# Altium PCB PCB1.PcbDoc
Units mil, origin at the board's own origin, x right, y up, seen from the top; angles counter-clockwise.
Board outline 5512.72 x 4848.62 mil, 2 copper layers (Top Layer, Bottom Layer); 49 components, 36 nets, 186 pads, 0 vias.
Unrouted connection lines stored in the file: 29.
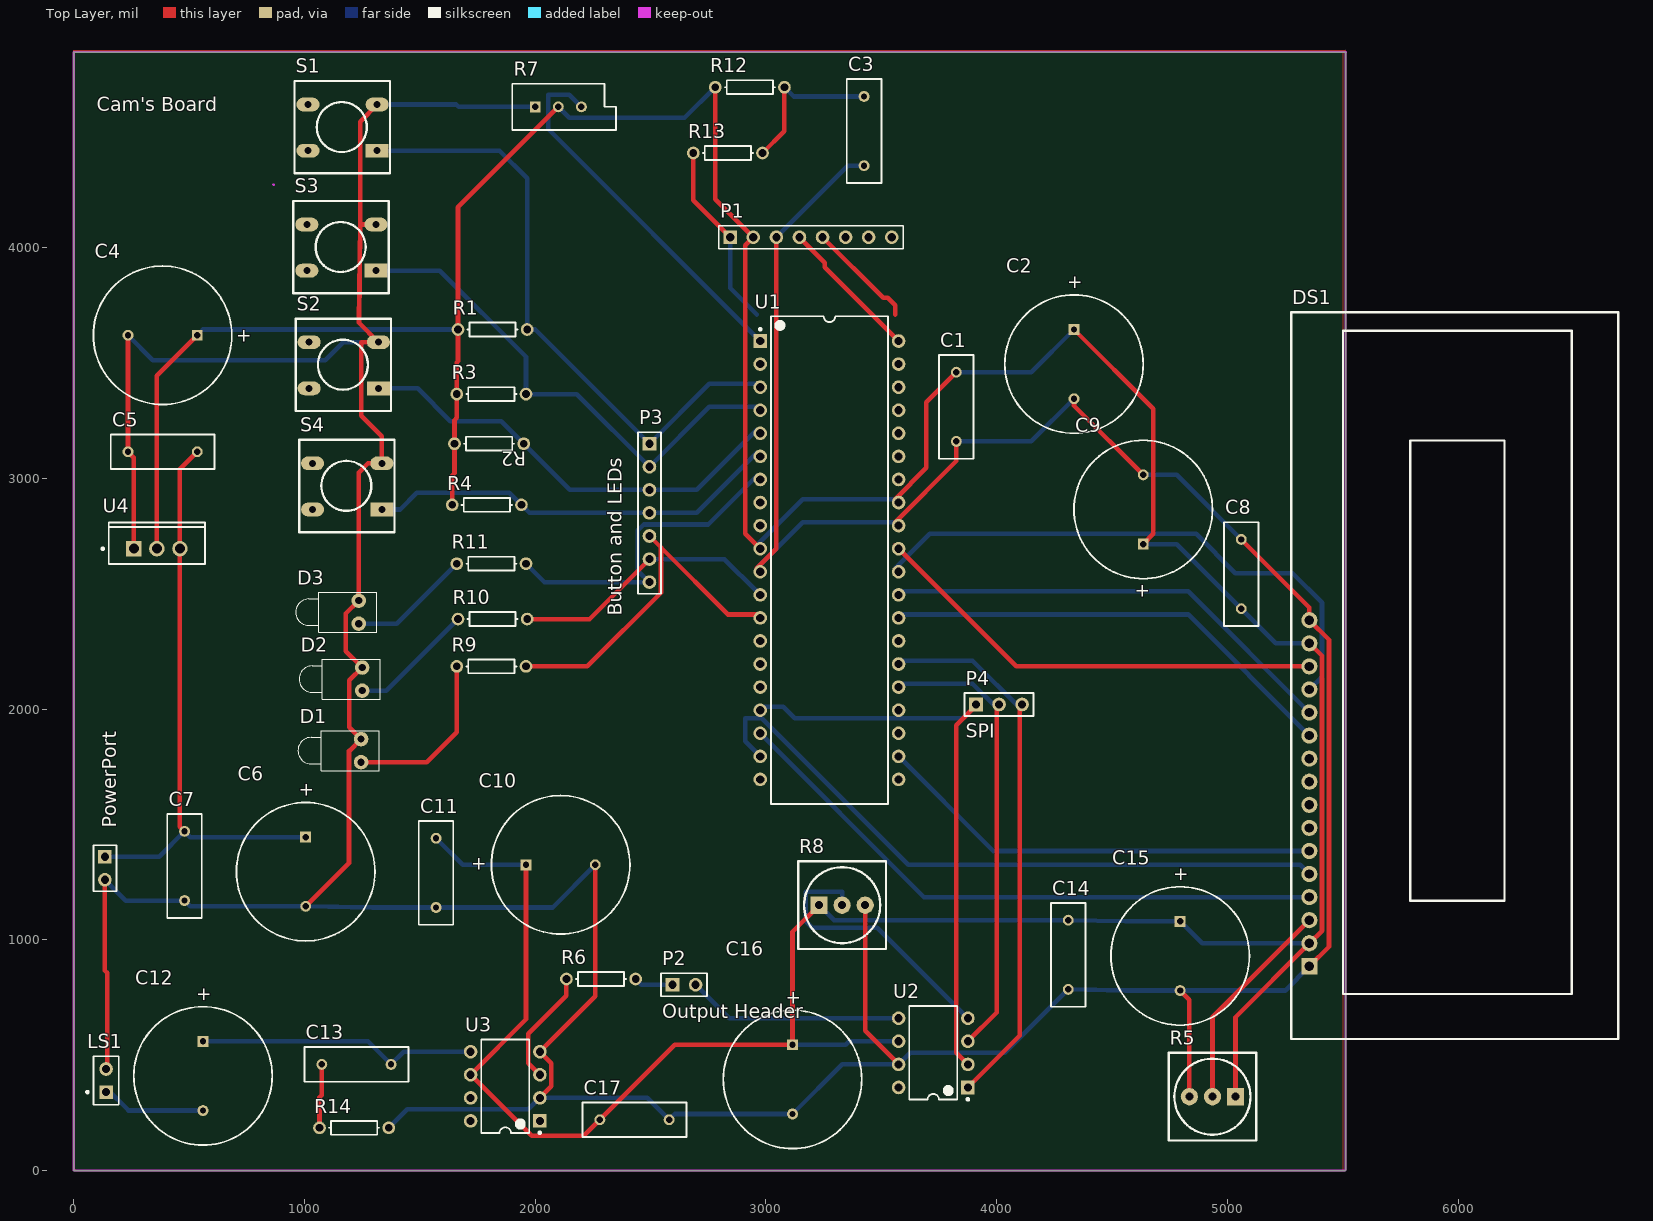
[diagram p0: Top Layer view]
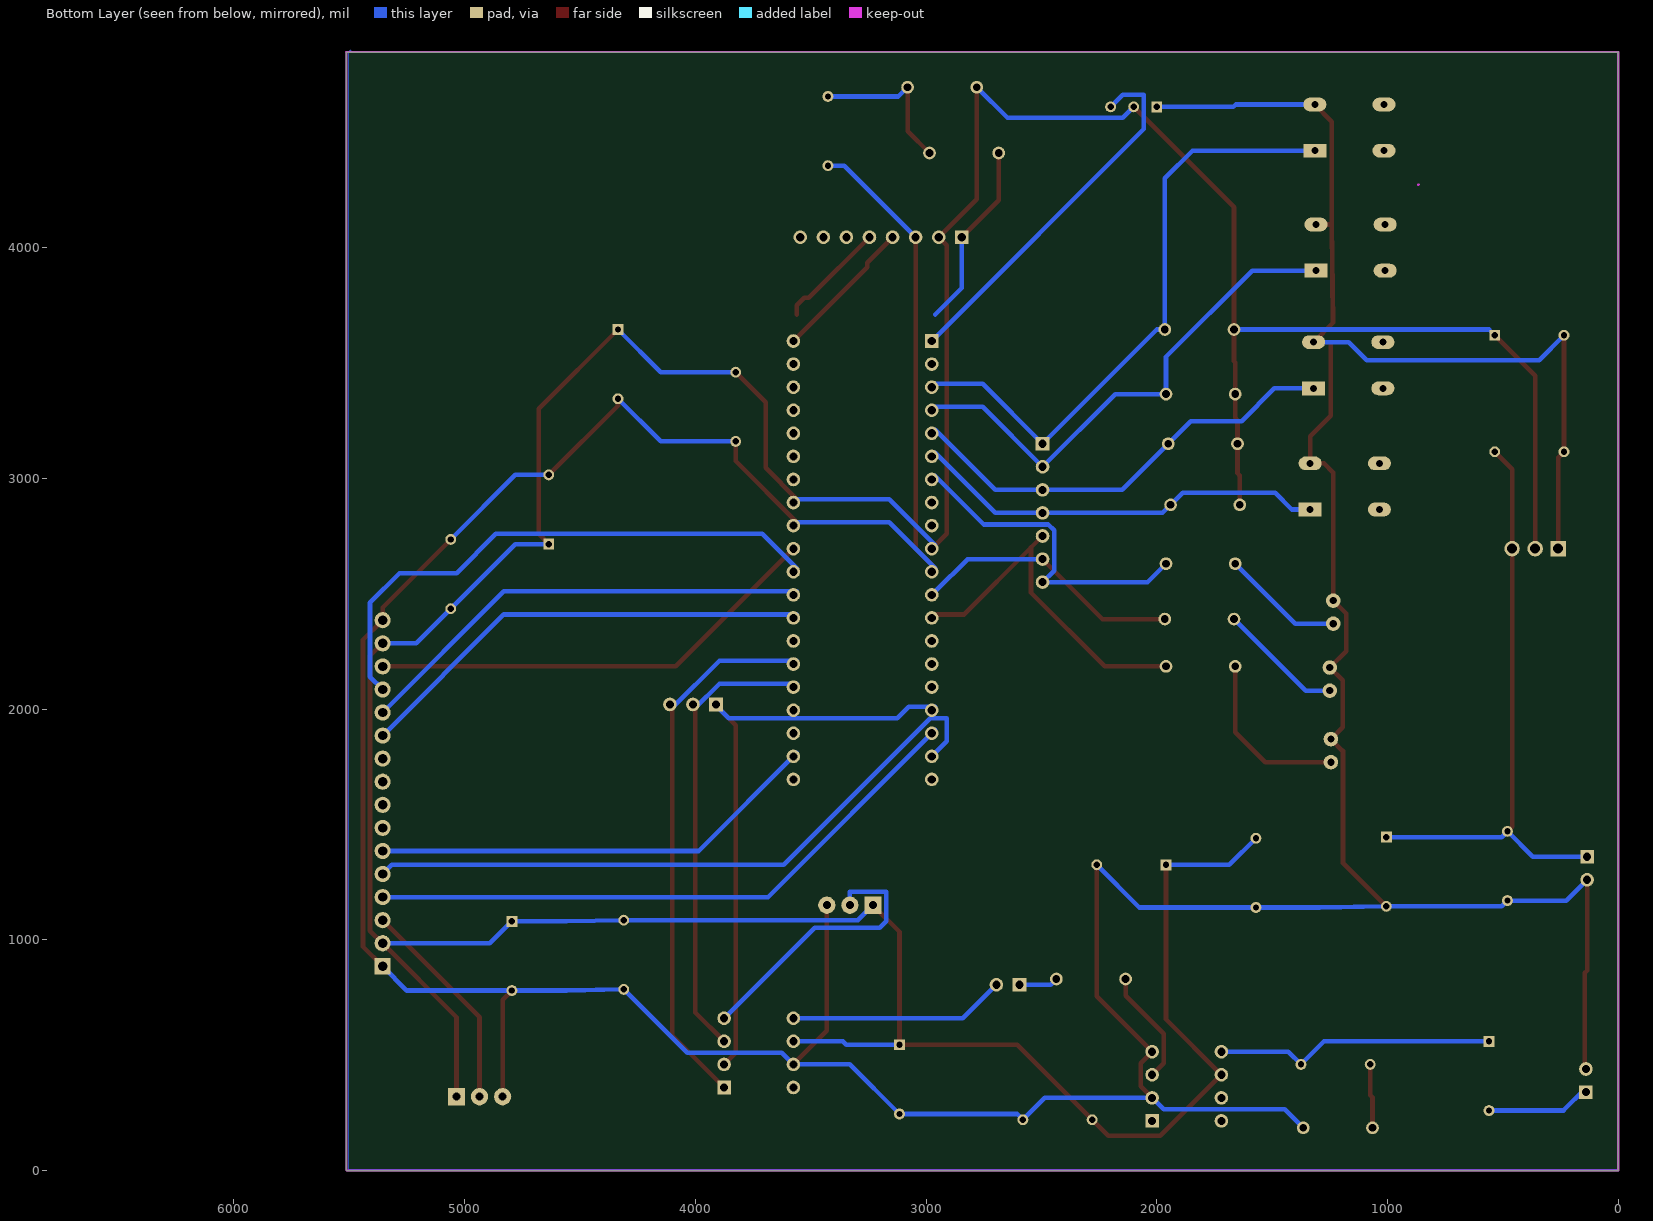
[diagram p1: Bottom Layer view, seen from below]

## Layer stack, top to bottom
Top Solder: solder mask 0.4, Solder Resist, Dk 3.5
Top Layer: signal copper 1.4
Dielectric 1: dielectric 12.6, FR-4, Dk 4.8
Bottom Layer: signal copper 1.4
Bottom Solder: solder mask 0.4, Solder Resist, Dk 3.5

## Board outline
0,0 5510,0 5511.72,1.72 5511.72,4846.28 5512.72,4847.28 1.34,4847.28 0,4848.62

## Design rules (kind name [scope] priority, off if disabled: settings)
Clearance [InPolygon] p1: gap=50 ignorepadtopadclearanceinfootprint=FALSE
PolygonConnect [All] p1: connectstyle=Relief reliefconductorwidth=10 reliefentries=4 polygonreliefangle="90 Angle" airgapwidth=10
RoutingVias [All] p1: holewidth=28 width=50 viastyle="Through Hole" minholewidth=28 minwidth=50 maxholewidth=28 maxwidth=50
SolderMaskExpansion [All] p1: expansion=4 istentingtop=FALSE
Width [All] p1: maxlimit=20 minlimit=20 preferedwidth=20
30 further rules are at their usual default settings.

## Components (designator, comment, footprint, x,y, rotation, side; value= is the part's Value field where it differs from the comment)
C1 "Cap" RAD-0.3 3825,3310 r90 top value=.1uF
C2 "Cap Pol1" RB7.6-15 4335,3495 r90 top value=100pF
C3 "Cap" RAD-0.3 3425,4505 r90 top value=0.1uF
C4 "Cap Pol1" RB7.6-15 385,3620 r0 top value=100pF
C5 "Cap" RAD-0.3 385,3115 r0 top value=0.47uF
C6 "Cap Pol1" RB7.6-15 1005,1295 r90 top value=100uF
C7 "Cap" RAD-0.3 480,1320 r90 top value=100nF
C8 "Cap" RAD-0.3 5060,2585 r270 top value=100pF
C9 "Cap Pol1" RB7.6-15 4635,2865 r270 top value=100pF
C10 "Cap Pol1" RB7.6-15 2110,1325 r180 top value=100pF
C11 "Cap" RAD-0.3 1570,1290 r90 top value=100pF
C12 "Cap Pol1" RB7.6-15 560,410 r90 top value=20uF
C13 "Cap" RAD-0.3 1225,460 r0 top value=100pF
C14 "Cap" RAD-0.3 4310,935 r270 top value=100pF
C15 "Cap Pol1" RB7.6-15 4795,930 r90 top value=100pF
C16 "Cap Pol1" RB7.6-15 3115,395 r90 top value=100pF
C17 "Cap" RAD-0.3 2430,220 r180 top value=100pF
D1 "LED1" LED-1 1245,1820 r180 top
D2 "LED1" LED-1 1250,2130 r180 top
D3 "LED1" LED-1 1235,2420 r180 top
DS1 "LCD 44780" "OLED 16x2" 5355,885 r90 top
LS1 "Speaker" PIN2 140,340 r90 top
P1 "Header 8" HDR1X8 2845,4045 r0 top
P2 "Output Header" HDR1X2 2595,805 r0 top
P3 "Button and LEDs" HDR1X7 2495,3150 r270 top
P4 "SPI" HDR1X3 3910,2020 r0 top
PowerPort "Header 2" HDR1X2 135,1360 r270 top
R1 "Res1" AXIAL-0.3 1815,3645 r0 top value=1K
R2 "Res1" AXIAL-0.3 1800,3150 r0 top value=1K
R3 "Res1" AXIAL-0.3 1810,3365 r0 top value=1K
R4 "Res1" AXIAL-0.3 1790,2885 r0 top value=1K
R5 "RPot_3" "Rpot Square in line" 4935,320 r270 top value=10K
R6 "Res1" AXIAL-0.3 2285,830 r180 top value=1K
R7 "RPot" VR5 2100,4610 r0 top value=1K
R8 "RPot_3" "Rpot Square in line" 3330,1150 r90 top value=10K
R9 "Res1" AXIAL-0.3 1810,2185 r180 top value=150
R10 "Res1" AXIAL-0.3 1815,2390 r180 top value=150
R11 "Res1" AXIAL-0.3 1810,2630 r180 top value=53
R12 "Res1" AXIAL-0.3 2930,4695 r180 top value=10k
R13 "Res1" AXIAL-0.3 2835,4410 r180 top value=470
R14 "Res1" AXIAL-0.3 1215,185 r180 top value=1K
S1 "SF SMD SW" "SW PB" 1315,4420 r180 top
S2 "SF SMD SW" "SW PB" 1320,3390 r180 top
S3 "SF SMD SW" "SW PB" 1310,3900 r180 top
S4 "SF SMD SW" "SW PB" 1335,2865 r180 top
U1 "PIC18F4620-I/P" PDIP600-P40 3275,2645 r0 top
U2 "LT1661" DIP-8 3725,510 r180 top
U3 "LM386N-1" DIP-8 1870,365 r180 top
U4 "LT1086CT-5" LT-T-3 360,2695 r90 top

## Footprints (in the part's own frame and the unit in brackets; to place one, negate y for a bottom-side part, rotate by r counter-clockwise, add the part's x,y. Pads: shape width x height; smd on the part's side, far side on the other; paste and mask are expansions set on the pad)
AXIAL-0.3 [mm] "Axial Device, Thru-Hole; 2 Leads; 0.3 in Pin Spacing"
  round 1.4 hole 0.85: 1(-3.81,0) 2(3.81,0)
  silkscreen extent -2.77,-0.76 2.77,0.76
DIP-8 [mm]
  rect 1.5x1.5 hole 0.9: 1(-3.81,3.81)
  round 1.5 hole 0.9: 2(-3.81,1.27) 3(-3.81,-1.27) 4(-3.81,-3.81) 5(3.81,-3.81) 6(3.81,-1.27) 7(3.81,1.27) 8(3.81,3.81)
  silkscreen extent -3.94,-5.15 2.65,5.23, body extent -3.6,-5.15 3.6,5.15, height 5.08
HDR1X2 [mm] "Connector; Header; 2 Position"
  rect 1.5x1.5 hole 0.9: 1(0,0)
  round 1.5 hole 0.9: 2(2.54,0)
  silkscreen extent -1.27,-1.27 3.81,1.27
HDR1X3 [mm] "Connector; Header; 3 Position"
  rect 1.5x1.5 hole 0.9: 1(0,0)
  round 1.5 hole 0.9: 2(2.54,0) 3(5.08,0)
  silkscreen extent -1.27,-1.27 6.35,1.27
HDR1X7 [mm] "Connector; Header; 7 Position"
  rect 1.5x1.5 hole 0.9: 1(0,0)
  round 1.5 hole 0.9: 2(2.54,0) 3(5.08,0) 4(7.62,0) 5(10.16,0) 6(12.7,0) 7(15.24,0)
  silkscreen extent -1.27,-1.27 16.51,1.27
HDR1X8 [mm] "Connector; Header; 8 Position"
  rect 1.5x1.5 hole 0.9: 1(0,0)
  round 1.5 hole 0.9: 2(2.54,0) 3(5.08,0) 4(7.62,0) 5(10.16,0) 6(12.7,0) 7(15.24,0) 8(17.78,0)
  silkscreen extent -1.27,-1.27 19.05,1.27
LED-1 [mm] "LED; 2 Leads"
  round 1.6 hole 0.8: 1(0,1.27) 2(0,-1.27)
  silkscreen extent -2,-2.2 6.95,2.2
LT-T-3 [mm]
  rect 1.7x1.7 hole 1.1: 1(0,2.54)
  round 1.7 hole 1.1: 2(0,0) 3(0,-2.54)
  silkscreen extent -1.7,-5.3 2.9,6.07, body extent -1.7,-5.28 2.9,5.28, height 22.15
"OLED 16x2" [mil]
  rect 70x70 hole 40: 1(0,0)
  round 70 hole 40: 2(100,0) 3(200,0) 4(300,0) 5(400,0) 6(500,0) 7(600,0) 8(700,0) 9(800,0) 10(900,0) 11(1000,0) 12(1100,0) 13(1200,0) 14(1300,0) 15(1400,0) 16(1500,0)
  silkscreen extent -315,-1339 2835,79
PDIP600-P40 [mm]
  rect 1.5x1.5 hole 0.9: 1(-7.62,24.13)
  round 1.5 hole 0.9: 2(-7.62,21.59) 3(-7.62,19.05) 4(-7.62,16.51) 5(-7.62,13.97) 6(-7.62,11.43) 7(-7.62,8.89) 8(-7.62,6.35) 9(-7.62,3.81) 10(-7.62,1.27) 11(-7.62,-1.27) 12(-7.62,-3.81) 13(-7.62,-6.35) 14(-7.62,-8.89) 15(-7.62,-11.43) 16(-7.62,-13.97) 17(-7.62,-16.51) 18(-7.62,-19.05) 19(-7.62,-21.59) 20(-7.62,-24.13) 21(7.62,-24.13) 22(7.62,-21.59) 23(7.62,-19.05) 24(7.62,-16.51) 25(7.62,-13.97) 26(7.62,-11.43) 27(7.62,-8.89) 28(7.62,-6.35) 29(7.62,-3.81) 30(7.62,-1.27) 31(7.62,1.27) 32(7.62,3.81) 33(7.62,6.35) 34(7.62,8.89) 35(7.62,11.43) 36(7.62,13.97) 37(7.62,16.51) 38(7.62,19.05) 39(7.62,21.59) 40(7.62,24.13)
  silkscreen extent -7.74,-26.85 6.45,26.85, body extent -7.3,-26.85 7.3,26.85, height 6.35
PIN2 [mm] "Photosensitive Diode; 2 Leads"
  rect 1.5x1.5 hole 0.9: 1(0,0)
  round 1.5 hole 0.9: 2(2.54,0)
  silkscreen extent -1.4,-1.4 3.94,2.17
RAD-0.3 [mm] "Radial Cap, Thru-Hole; 2 Leads; 0.3 in Pin Spacing"
  round 1.2 hole 0.7: 1(-3.81,0) 2(3.81,0)
  silkscreen extent -5.71,-1.91 5.71,1.91
RB7.6-15 [mm] "Polarized Capacitor (Radial); 2 Leads"
  rect 1.2x1.2 hole 0.7: 1(3.81,0)
  round 1.2 hole 0.7: 2(-3.81,0)
  silkscreen extent -7.62,-7.62 7.62,7.62
"Rpot Square in line" [mil]
  rect 75x75 hole 35: 1(0,100)
  round 75 hole 35: 2(0,0) 3(0,-100)
  silkscreen extent -190,-190 190,190
"SW PB" [mil]
  rect 100x60 hole 30: 1(0,0)
  oval 100x60 hole 30: 2(0,-200) 3(300,-200) 4(300,0)
  silkscreen extent -55,-302 358,98
VR5 [mm] "Thru-Hole; 3 Leads"
  rect 1.2x1.2 hole 0.7: 1(-2.54,0)
  round 1.2 hole 0.7: 2(0,0) 3(2.54,0)
  silkscreen extent -5.08,-2.54 6.35,2.54

## Part data
C1 C3 C5 C7 C8 C11 C13 C14 C17: "Capacitor", LatestRevisionDate=17-Jul-2002, LatestRevisionNote="Re-released for DXP Platform.", PackageDescription="Radial Cap, Thru-Hole; 2 Leads; 0.3 in Pin Spacing", PackageReference=RAD-0.3, Published=8-Jun-2000, Publisher="Altium Limited"
C2 C4 C6 C9 C10 C12 C15 C16: "Polarized Capacitor (Radial)", LatestRevisionDate=17-Jul-2002, LatestRevisionNote="Re-released for DXP Platform.", PackageDescription="Polarized Capacitor (Radial); 2 Leads", PackageReference=RB7.6-15, Published=8-Jun-2000, Publisher="Altium Limited"
D1 D2 D3: "Typical RED GaAs LED", LatestRevisionDate=08-Jul-2005, LatestRevisionNote="Mech Layer 1 removed.", PackageDescription="LED; 2 Leads", PackageReference=LED-1, Published=8-Jun-2000, Publisher="Altium Limited"
LS1: "Loudspeaker", LatestRevisionDate=17-Jul-2002, LatestRevisionNote="Re-released for DXP Platform.", PackageReference=PIN2, Published=24-Mar-1999, Publisher="Altium Limited"
P1: "Header, 8-Pin", LatestRevisionDate=17-Jul-2002, LatestRevisionNote="Re-released for DXP Platform.", Publisher="Altium Limited"
P2: library part "Header 2", "Header, 2-Pin", LatestRevisionDate=17-Jul-2002, LatestRevisionNote="Re-released for DXP Platform.", Publisher="Altium Limited"
P3: library part "Header 7", "Header, 7-Pin", LatestRevisionDate=17-Jul-2002, LatestRevisionNote="Re-released for DXP Platform.", Publisher="Altium Limited"
P4: library part "Header 3", "Header, 3-Pin", LatestRevisionDate=17-Jul-2002, LatestRevisionNote="Re-released for DXP Platform.", Publisher="Altium Limited"
PowerPort: "Header, 2-Pin", LatestRevisionDate=17-Jul-2002, LatestRevisionNote="Re-released for DXP Platform.", Publisher="Altium Limited"
R1 R2 R3 R4 R6 R9 R10 R11 R12 R13 R14: "Resistor", LatestRevisionDate=17-Jul-2002, LatestRevisionNote="Re-released for DXP Platform.", PackageDescription="Axial Device, Thru-Hole; 2 Leads; 0.3 in Pin Spacing", PackageReference=AXIAL-0.3, Published=8-Jun-2000, Publisher="Altium Limited"
R5 R8: library part RPot_7, "Potentiometer", LatestRevisionDate=17-Jul-2002, LatestRevisionNote="Re-released for DXP Platform.", Published=8-Jun-2000, Publisher="Altium Limited", Set Position=0.5, Sim Note="Enter the Resistance value and the set point into parameter fields."
R7: "Potentiometer", LatestRevisionDate=17-Jul-2002, LatestRevisionNote="Re-released for DXP Platform.", PackageDescription="Variable Resistor, Thru-Hole; 3 Leads", PackageReference=VR5, Published=8-Jun-2000, Publisher="Altium Limited", Set Position=0.5, Sim Note="Enter the Resistance value and the set point into parameter fields."
S1 S2 S3 S4: library part SW-PB_1, "DIGIKEY SW400-ND", LatestRevisionDate=17-Jul-2002, LatestRevisionNote="Re-released for DXP Platform.", Published=24-Mar-1999, Publisher="Altium Limited"
U1: "Enhanced Flash Microcontroller with 10-Bit A/D and nanoWatt Technology, 64K Flash, 40-Pin PDIP, Industrial Temperature Range", ComponentLink1Description="Manufacturer URL", ComponentLink1URL=http://www.microchip.com/, ComponentLink2Description=Datasheet, ComponentLink2URL=http://ww1.microchip.com/downloads/en/DeviceDoc/39626e.pdf, ComponentLink3Description="Package Specification", ComponentLink3URL=http://www.microchip.com/stellent/groups/techpub_sg/documents/packagingspec/en012702.pdf, DatasheetVersion="revE, May-2008", PackageDescription="40-Lead Plastic Dual In-Line (P) - 600 mil Body [PDIP]", PackageReference=PDIP600-P40, PackageVersion="revBB, Aug-2009"
U3: "Low-Voltage Audio Power Amplifier", PackageDocument=Sep-1997, DatasheetDocument=Sep-1997, PackageReference=N08E, Published=15-Apr-2002, Publisher="Altium Limited"
U4: "1.5 A Low Dropout Positive Regulator, 2.55 to 25 V Vin, 5 V Vout, 3-pin FM (T-3), 0 to 150 degC", Dropout Voltage(V)=1.3, Manufacturer="Linear Technology", Output Voltage="5 V", Supplier Part Number 1=LT1086CT-5-ND, ComponentLink1Description="Manufacturer URL", ComponentLink1URL=http://www.linear.com/, ComponentLink2Description=Datasheet, ComponentLink2URL=http://cds.linear.com/docs/en/datasheet/1086ffs.pdf, ComponentLink3Description="Package Specification", ComponentLink3URL=http://cds.linear.com/docs/en/packaging/TO-220_3_05-08-1420.pdf, DatasheetVersion="Rev. F", Discrete Pass Element=no, Iout(mA)=1500, Isupply(mA)=5, Mounting Technology="Through Hole", Number of Outputs=1, PackageDescription="3-Pin Plastic TO-220, Body 10.2235 x 4.3815 mm, Pitch 2.54 mm", PackageReference=T-3, PackageVersion=Jun-10, PartNumber=LT1086CT-5, PSRR(dB)=68, RoHS=FALSE, Supplier 1=Digi-Key, Supplier 2=Newark, Supplier Part Number 2=57M1554, Vin Max(V)=25, Vin Min(V)=2.55

## Nets (pads, with @x,y where several pads share a name; then routed paths per layer and width w, separated by ;. In a path a pad name is that pad's centre, name@x,y a point inside that pad or via, vN(x,y) a via of type N, cw(c..) or ccw(c..) an arc to the next point about the centre after c; other vN are vias at no path point)
5V: C1.2 C2.1 C4.1 C8.2 C9.1 C10.1 C11.2 C14.1 C15.1 C16.1 C17.2 DS1.2 DS1.15 P1.2 R1.1 R2.1 R3.1 R4.1 R5.1 R7.2 R8.1 R12.2 U1.11 U1.32 U2.6 U3.6 U4.2 | length 19383.7
  Top Layer w20: U4.2 360,3445 C4.1 ; R4.1 1640,3012 1650,3022 R2.1 1650,3252 1660,3262 R3.1 1660,3502 1665,3507 R1.1 1665,4175 R7.2 ; C10.1 1960,655 U3.6 1985,150 2210,150 C17.2 2605,545 C16.1 3115,1035 R8.1 ; R12.2 2780,4210 P1.2 2910,4010 2910,2760 2960,2710 ; 3560,2910 3695,3045 3695,3330 C1.2 ; C2.1 4679,3301 4679,2759 C9.1 ; R5.1 5035,665 DS1.2 5410,1040 5410,2230 DS1.15
  Bottom Layer w20: C4.1 560,3645 R1.1 ; C11.2 1685,1325 C10.1 ; R7.2 2148,4562 2647,4562 R12.2 ; 2960,2710 3160,2910 3560,2910 ; C16.1 3345,545 3360,560 U2.6 ; R8.1 3295,1085 C14.1 4558,1080 C15.1 4890,985 DS1.2 ; C1.2 4150,3460 C2.1 ; C9.1 4780,2715 C8.2 5210,2285 DS1.15
/SS: P4.3 U1.25 U2.1 | length 2363.1
  Top Layer w20: U2.1 4100,585 P4.3@4100,2005
  Bottom Layer w20: 3560,2210 3895,2210 P4.3@4100,2005
A: P3.1 R1.2 S1.1 U1.4 | length 2662.4
  Bottom Layer w20: S1.1 1845,4420 1965,4300 R1.2 2000,3645 P3.1 2755,3410 2960,3410
B: P3.2 R3.2 S3.1 U1.5 | length 2204.1
  Bottom Layer w20: S3.1 1586,3900 1960,3526 R3.2 2180,3365 P3.2 2755,3310 2960,3310
BLUE: P3.7 R11.1 U1.8 | length 1426.2
  Bottom Layer w20: R11.1 2040,2550 P3.7 2445,2600 2445,2775 2470,2800 2750,2800 2960,3010
C: P3.3 R2.2 S2.1 U1.6 | length 1929.9
  Bottom Layer w20: S2.1 1490,3390 1632,3248 1852,3248 R2.2 2150,2950 P3.3 2700,2950 2960,3210
clock: P4.1 U1.18 U2.2 | length 2576.1
  Top Layer w20: U2.2 3825,510 3825,1930 P4.1@3900,2005
  Bottom Layer w20: 2960,2010 3074.09,2010 3124.09,1960 3855,1960 P4.1@3900,2005
D: P3.4 R4.2 S4.1 U1.7 | length 1798.6
  Bottom Layer w20: S4.1 1415,2865 1487,2937 1888,2937 R4.2 1975,2850 P3.4 2700,2850 2960,3110
D4: DS1.11 U1.27 | length 2012.5
  Bottom Layer w20: 3560,2410 4830,2410 DS1.11
D5: DS1.12 U1.28 | length 2012.5
  Bottom Layer w20: 3560,2510 4830,2510 DS1.12
D6: DS1.13 U1.29 | length 2433.9
  Bottom Layer w20: 3560,2610 3709,2759 4864,2759 5034,2589 5282,2589 5410,2461 5410,2140 DS1.13
D7: DS1.14 U1.30 | length 2012.5
  Top Layer w20: 3560,2710 4085,2185 DS1.14
data: P4.2 U1.24 U2.3 | length 1980.3
  Top Layer w20: U2.3 4000,685 P4.2@4000,2005
  Bottom Layer w20: 3560,2110 3895,2110 P4.2@4000,2005
E: DS1.6 U1.21 | length 1971
  Bottom Layer w20: 3560,1810 3985,1385 DS1.6
GND: C1.1 C2.2 C3.1 C4.2 C5.1 C6.2 C7.1 C8.1 C9.2 C10.2 C11.1 C14.2 C15.2 C16.2 C17.1 D1.2 D2.2 D3.2 DS1.1 DS1.16 LS1.2 P1.3 PowerPort.2 R5.3 R7.1 R8.3 R14.1 S1.2 S2.2 S3.2 S4.2 U1.12 U1.31 U2.7 U3.2 U3.4 U4.1 | length 23324.8
  Top Layer w20: PowerPort.2 135,867 145,857 LS1.2@145,452.36 ; C4.2 C5.1 260,3090 U4.1 ; C6.2 1193,1333 1193,1818 D1.2 1194,1921 1194,2124 D2.2 1179,2251 1179,2414 D3.2 1235,3025 1275,3065 S4.2 1335,3183 1246,3272 1246,3590 S2.2 1236,3674 1241,4100 ; S3.2 1241,4100 ; S1.2 1241,4546 1241,4100 ; U3.2 2070,365 2070,465 U3.4 2260,755 C10.2 ; 2960,2610 3045,2695 P1.3 ; R8.3 3430,605 U2.7 ; 3560,2810 3825,3075 C1.1 ; C2.2 4335,3315 C9.2 ; C15.2 4835,740 R5.3 ; C8.1 5355,2440 DS1.16 5440,2300 5440,970 DS1.1
  Bottom Layer w20: PowerPort.2 225,1170 C7.1 505,1145 C6.2 1293,1140 C11.1 2075,1140 C10.2 ; C4.2 343,3512 1090,3512 1168,3590 S2.2 ; S1.2 1658,4620 1668,4610 R7.1 ; R14.1 1445,265 1970,265 U3.2 2485,315 C17.1 2605,245 C16.2 3330,460 U2.7 3625,510 4035,510 C14.2 4558,780 C15.2 5250,780 DS1.1 ; 2960,2610 3160,2810 3560,2810 ; P1.3 3355,4355 C3.1 ; C1.1 4150,3160 C2.2 ; C9.2 4780,3015 C8.1
GREEN: P3.6 R10.1 U1.13 | length 1160.7
  Top Layer w20: R10.1 2235,2390 P3.6
  Bottom Layer w20: P3.6 2820,2650 2960,2510
Harmonic: R7.3 U1.2 | length 1592
  Bottom Layer w20: R7.3 2148,4662 2056,4662 2056,4514 2960,3610
MCLR: P1.1 R13.2 U1.1 | length 813.9
  Top Layer w20: R13.2 2685,4205 P1.1
  Bottom Layer w20: P1.1 2845,3825 2960,3710
NetC3_2: C3.2 R12.1 R13.1 | length 685.9
  Top Layer w20: R13.1 3080,4505 R12.1
  Bottom Layer w20: R12.1 3120,4655 C3.2
NetC12_1: C12.1 C13.2 U3.5 | length 1224.2
  Bottom Layer w20: C12.1 1275,560 C13.2 1430,515 U3.5
NetC12_2: C12.2 LS1.1 | length 453.3
  Bottom Layer w20: LS1.1@145,352.36 237.36,260 C12.2
NetC13_1: C13.1 R14.2 | length 279.1
  Top Layer w20: R14.2 1065,317 1075,327 C13.1
NetD1_1: D1.1 R9.2 | length 753.8
  Top Layer w20: D1.1 1530,1770 1660,1900 R9.2
NetD2_1: D2.1 R10.2 | length 543.4
  Bottom Layer w20: D2.1 1355,2080 R10.2
NetD3_1: D3.1 R11.2 | length 532.7
  Bottom Layer w20: D3.1 1400,2370 R11.2
NetR6_2: R6.2 U3.3 | length 504.1
  Top Layer w20: U3.3 1970,465 1970,593 2135,758 R6.2
OutputA: P2.1 R6.1 | length 170.4
  Bottom Layer w20: R6.1 2460,805 P2.1
OutputB: P2.2 U2.5 | length 940.1
  Bottom Layer w20: P2.2 2840,660 U2.5
PGC: P1.4 U1.39 | length 606.9
  Top Layer w20: P1.4 3255,3935 3255,3915 3560,3610
PGD: P1.5 U1.40 | length 477.2
  Top Layer w20: P1.5 3508,3782 3528,3782 3560,3750 3560,3710
Power: C5.2 C6.1 C7.2 PowerPort.1 U4.3 | length 2610.3
  Top Layer w20: C7.2 460,1490 U4.3 460,3040 C5.2
  Bottom Layer w20: PowerPort.1 370,1360 C7.2 505,1445 C6.1
RED: P3.5 R9.1 U1.14 | length 1519
  Top Layer w20: R9.1 2226,2185 2545,2504 2545,2700 ; P3.5 2545,2700 ; 2960,2410 2835,2410 2545,2700
RS: DS1.4 U1.19 | length 2695.3
  Bottom Layer w20: 2960,1910 3685,1185 DS1.4
RW: DS1.5 U1.20 | length 2895.3
  Bottom Layer w20: 2960,1810 2910,1860 2910,1960 2982,1960 3617,1325 5315,1325 DS1.5
VO: DS1.3 R5.2 | length 939
  Top Layer w20: R5.2 4935,665 DS1.3
Vref: R8.2 U2.4 | length 1220.4
  Bottom Layer w20: R8.2 3330,1208 3172,1208 3172,1081 3200,1053 3482,1053 U2.4
pads on no net: DS1.7 DS1.8 DS1.9 DS1.10 P1.6 P1.7 P1.8 S1.3 S1.4 S2.3 S2.4 S3.3 S3.4 S4.3 S4.4 U1.3 U1.9 U1.10 U1.15 U1.16 U1.17 U1.22 U1.23 U1.26 U1.33 U1.34 U1.35 U1.36 U1.37 U1.38 U2.8 U3.1 U3.7 U3.8

## Polygon pours and split planes (outlines as drawn)
5V on Top Layer "NONET_L01_P000" (hatched 45Degree grid 20 track 8, shelved, pour order 0): 5,25 0,30 0,4855 5510,4855 5500,4845 5500,0 10,0 0,10
GND on Bottom Layer "NONET_L02_P001" (hatched 45Degree grid 20 track 8, shelved, pour order 1): 0,4845 5485,4845 5495,4855 5505,4845 5505,5 5,5 0,0

## Keep-outs
Keep-Out Layer:
  lines w10: 865,4273.62 866.34,4272.28 ; 0,0 5510,0 5511.72,1.72 5511.72,4846.28 5512.72,4847.28 0,4847.28 0,0

## Silkscreen, mask and mechanical layers (free items; w line width, h text height)
Top Overlay:
  text "Cam's Board" at 100,4590 h60

## Text inside footprints (layer, text, board x,y; h text height)
C2: Top Overlay "+" at 4364.01,3815.15 h59.06 r90
C4: Top Overlay "+" at 705.15,3590.99 h59.06
C6: Top Overlay "+" at 1034.01,1615.15 h59.06 r90
C9: Top Overlay "+" at 4605.99,2544.85 h59.06 r270
C10: Top Overlay "+" at 1789.85,1354.01 h59.06 r180
C12: Top Overlay "+" at 589.01,730.15 h59.06 r90
C15: Top Overlay "+" at 4824.01,1250.15 h59.06 r90
C16: Top Overlay "+" at 3144.01,715.15 h59.06 r90